# Altium PCB NiHAAx1to6.PcbDoc
Units mm, origin at the board's own origin, x right, y up, seen from the top; angles counter-clockwise.
Board outline 87.76 x 15.1 mm, 2 copper layers (Top Layer, Bottom Layer); 56 components, 30 nets, 145 pads, 163 vias.
Unrouted connection lines stored in the file: 1.
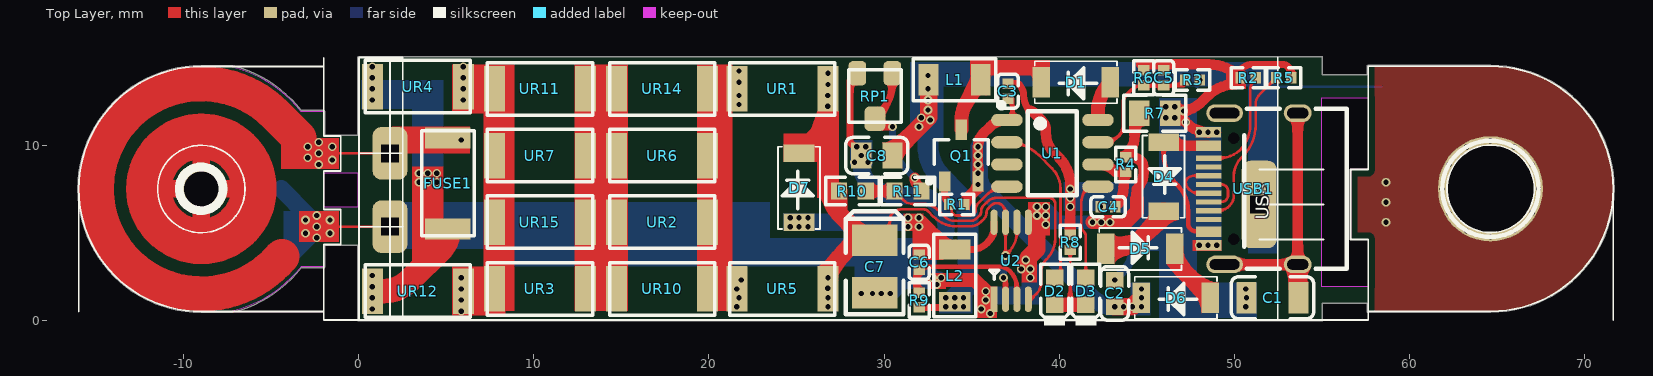
[diagram p0: Top Layer view]
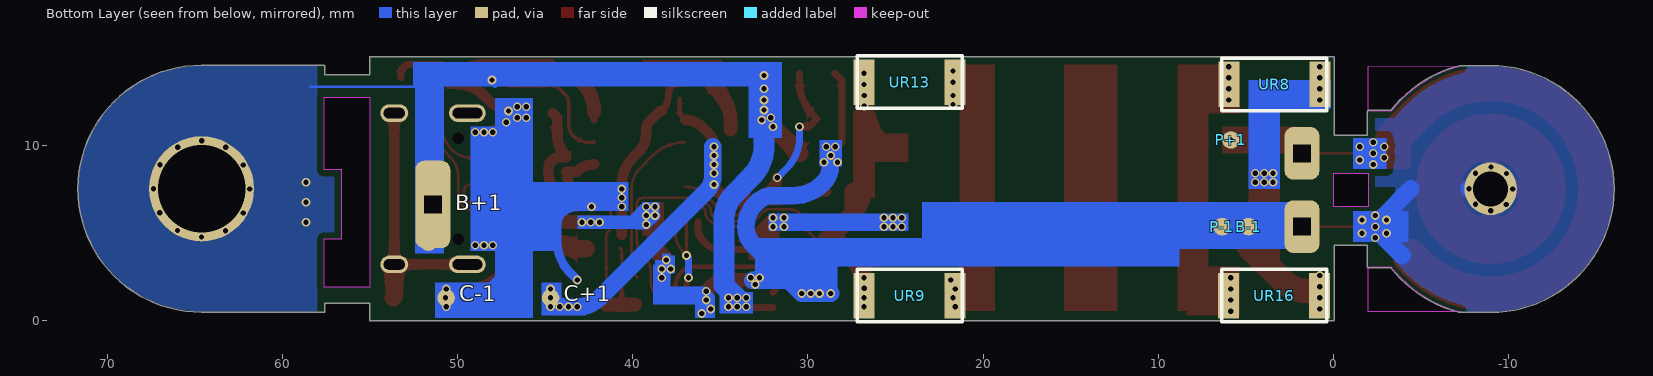
[diagram p1: Bottom Layer view, seen from below]
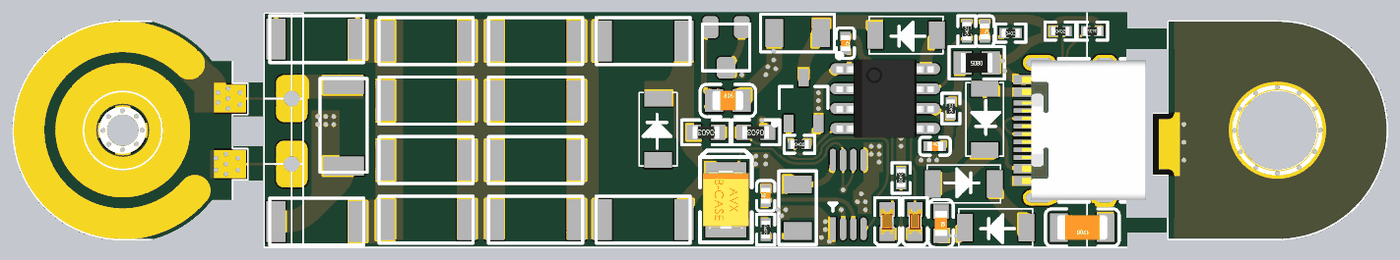
[diagram p2: 3D render of the assembled board from above, using the file's embedded part models]

## Layer stack, top to bottom
Top Solder: solder mask 0.0102, Solder Resist, Dk 3.5
Top Layer: signal copper 0.0356
Dielectric 1: dielectric 0.32, FR-4, Dk 4.8
Bottom Layer: signal copper 0.0356
Bottom Solder: solder mask 0.0102, Solder Resist, Dk 3.5

## Board outline
-9,0.436 -7.226,0.436 ccw(c-7.226,0.486) -7.195,0.447 ccw(c-8.986,7.472) -3.281,2.998 -2,2.998 ccw(c-2,3.048) -1.95,3.048 -1.95,4.27 -0.05,4.27 -0.05,0 ccw(c0,0) 0,-0.05 55,-0.05 ccw(c55,0) 55.05,0 55.05,0.966 57.608,0.966 57.608,0.5 ccw(c57.658,0.5) 57.658,0.45 64.658,0.45 ccw(c64.658,0.5) 64.659,0.45 ccw(c64.658,7.5) 71.708,7.5 ccw(c64.658,7.5) 64.658,14.55 ccw(c64.658,14.5) 64.657,14.55 57.658,14.55 ccw(c57.658,14.5) 57.608,14.5 57.608,14.02 55.05,14.02 55.05,15 ccw(c55,15) 55,15.05 0,15.05 ccw(c0,15) -0.05,15 -0.05,10.561 -1.963,10.561 -1.963,11.924 ccw(c-2.014,11.924) -2.014,11.975 -3.295,11.975 ccw(c-9,7.5) -7.216,14.527 ccw(c-7.245,14.486) -7.245,14.536 -9,14.536 ccw(c-9,7.486)
cut-out: -2,6.48 -0.03,6.48 -0.03,8.4 -2,8.4
cut-out: 55,1.905 55,12.7 57.658,12.7 57.658,8.604 56.658,8.604 56.658,4.604 57.658,4.604 57.658,1.905
cut-out: -7.239,0.486 -2,0.486 -2,3.048 -3.306,3.048 cw(c-8.986,7.472)
cut-out: -7.24,14.482 cw(c-9,7.5) -3.32,11.924 -2.014,11.924 -2.014,14.486

## Design rules (kind name [scope] priority, off if disabled: settings)
Clearance TL_B+_CLE [InNamedPolygon('TL_B+')] p1: gap=0.4 ignorepadtopadclearanceinfootprint=FALSE except(0: Arc-Text Arc-Hole Track-Text Track-Hole SMDPad-Text SMDPad-Hole THPad-Text THPad-Hole Via-Text Via-Hole Fill-Text Fill-Hole Poly-Text Poly-Hole Region-Text Region-Hole Text-Text Text-Hole)
Clearance BL-B-_CLE [InNamedPolygon('BL-B-')] p2: gap=0.4 ignorepadtopadclearanceinfootprint=FALSE except(0: Arc-Text Arc-Hole Track-Text Track-Hole SMDPad-Text SMDPad-Hole THPad-Text THPad-Hole Via-Text Via-Hole Fill-Text Fill-Hole Poly-Text Poly-Hole Region-Text Region-Hole Text-Text Text-Hole)
Clearance BL_B+_CLE [InNamedPolygon('BL_B+')] p3: gap=0.4 ignorepadtopadclearanceinfootprint=FALSE except(0: Arc-Text Arc-Hole Track-Text Track-Hole SMDPad-Text SMDPad-Hole THPad-Text THPad-Hole Via-Text Via-Hole Fill-Text Fill-Hole Poly-Text Poly-Hole Region-Text Region-Hole Text-Text Text-Hole)
Clearance [All] p4: gap=0.152 ignorepadtopadclearanceinfootprint=FALSE except(0: Arc-Hole Track-Hole SMDPad-Hole THPad-Hole Via-Hole Fill-Hole Poly-Hole Region-Hole Text-Hole)
PolygonConnect TL_B+_STY [All vs IsNamedPolygon('TL_B+')] p1: thpad.connectstyle=Direct thpad.reliefconductorwidth=0.254 thpad.reliefentries=4 thpad.polygonreliefangle="90 Angle" thpad.airgapwidth=0.254 smdpad.connectstyle=Direct smdpad.reliefconductorwidth=0.254 smdpad.reliefentries=4 smdpad.polygonreliefangle="90 Angle" smdpad.airgapwidth=0.254 via.connectstyle=Relief via.reliefconductorwidth=1 via.reliefentries=4 via.polygonreliefangle="90 Angle" via.airgapwidth=0.254
PolygonConnect BL-B-_STY [All vs IsNamedPolygon('BL-B-')] p2: connectstyle=Direct reliefconductorwidth=0.254 reliefentries=4 polygonreliefangle="90 Angle" airgapwidth=0.254
PolygonConnect BL_B+_STY [All vs IsNamedPolygon('BL_B+')] p3: thpad.connectstyle=Direct thpad.reliefconductorwidth=0.254 thpad.reliefentries=4 thpad.polygonreliefangle="90 Angle" thpad.airgapwidth=0.254 smdpad.connectstyle=Direct smdpad.reliefconductorwidth=0.254 smdpad.reliefentries=4 smdpad.polygonreliefangle="90 Angle" smdpad.airgapwidth=0.254 via.connectstyle=Relief via.reliefconductorwidth=1 via.reliefentries=4 via.polygonreliefangle="90 Angle" via.airgapwidth=0.254
PolygonConnect [All] p4: connectstyle=Relief reliefconductorwidth=0.254 reliefentries=4 polygonreliefangle="90 Angle" airgapwidth=0.254
RoomDefinition NiHAAx1to6 [InComponentClass('NiHAAx1to6')] p1: confinementstyle=ConfineOut formatcopy=TRUE lockcomponents=FALSE outline 4.318,18.161 25.781,18.161 25.781,20.828 4.318,20.828
RoutingVias [All] p1: holewidth=0.3 width=0.5 viastyle="Through Hole" minholewidth=0.3 minwidth=0.5 maxholewidth=5 maxwidth=5
SolderMaskExpansion [All] p1: expansion=0.102
Width [All] p1: maxlimit=5 minlimit=0.152 preferedwidth=0.254 minimp=50.000000 maximp=50.000000 favimp=50.000000
30 further rules are at their usual default settings.

## Components (designator, comment, footprint, x,y, rotation, side; value= is the part's Value field where it differs from the comment)
B+1 "B+" TAP 51.689,4.445 r90 bottom
B-1 "B-" TAP 4.826,5.334 r90 bottom
C1 "1nF (102) 10% 500V" 1206_C 52.197,1.27 r180 top
C2 "10uF (106) 10% 10V" 0603_C 43.18,1.524 r270 top
C3 "100nF (104) 10% 16V" 0402_C 37.084,13.081 r270 top
C4 "100nF (104) 10% 16V" 0402_C 42.799,6.477 r0 top
C5 "100nF (104) 10% 16V" 0402_C 45.974,13.843 r270 top
C6 "4.7pF (4R7) 0.25pF 50V" 0402_C 32.004,3.302 r90 top
C7 "100uF (107) ±10% 6.3V" CASE-B_3528 29.464,3.048 r90 top
C8 "22uF (226) 20% 25V" 0805_C 29.591,9.398 r0 top
C+1 "C+" TAP 44.704,1.27 r90 bottom
C-1 "C-" TAP 50.673,1.27 r90 bottom
D1 "M7" CMS01 43.307,14.789 r180 top
D2 "绿灯 0603" 0603_LED_S1 39.751,1.651 r90 top
D3 "红灯 0603" 0603_LED_S1 41.529,1.651 r90 top
D4 "M7" CMS01 44.774,10.541 r270 top
D5 "M7" CMS01 42.291,2.864 r0 top
D6 "M7" CMS01 49.022,2.47 r180 top
D7 "M7" CMS01 26.346,5.207 r90 top
FUSE1 "OMF125" 2512 3.58,10.807 r270 top
L1 "10uH ±10%" 1206_L 34.036,13.716 r180 top
L2 "4.7uH  ±10%" 1206_L 34.036,2.54 r90 top
P+1 "P+" TAP 5.842,10.287 r90 bottom
P-1 "P-" TAP 6.35,5.334 r90 bottom
Q1 "AO3401A P道沟 X13A15 SOT-23" SOT-23-3L 34.417,9.398 r270 top
R1 "100KΩ (1003) ±1%" 0402_R 34.163,6.604 r0 top
R2 "5.1KΩ (5101) ±1%" 0402_R 50.8,13.843 r0 top
R3 "1MΩ (1004) ±1%" 0402_R 47.625,13.716 r0 top
R4 "10KΩ (1002) ±1%" 0402_R 43.815,8.89 r90 top
R5 "5.1KΩ (5101) ±1%" 0402_R 52.832,13.843 r180 top
R6 "1MΩ (1004) ±1%" 0402_R 44.831,13.843 r90 top
R7 "10KΩ (1002) ±1%" 0805_R 45.466,11.811 r180 top
R8 "1KΩ (1001) ±1%" 0402_R 40.64,4.445 r270 top
R9 "150KΩ (1503) ±1%" 0402_R 32.004,1.143 r270 top
R10 "620KΩ (6203) ±1%" 0603_R 28.194,7.366 r180 top
R11 "130KΩ (1303) ±1%" 0603_R 31.369,7.366 r180 top
RP1 "ST-32ETA104" ST-32ETA104 27.98,14.297 r270 top
U1 "HXT8676" SOP-8_150mil 39.624,9.525 r270 top
U2 "LM2623MM" VSSOP8_3×3mm 36.292,1.188 r90 top
UR1 "R" 2512 27.19,14.708 r180 top
UR2 "R" 2512 20.325,7.088 r180 top
UR3 "R" 2512 13.347,3.278 r180 top
UR4 "R" 2512 6.369,14.835 r180 top locked
UR5 "R" 2512 27.19,3.278 r180 top locked
UR6 "R" 2512 20.325,10.898 r180 top
UR7 "R" 2512 13.347,10.898 r180 top
UR8 "R" 2512 6.362,11.962 r180 bottom locked
UR9 "R" 2512 27.197,-0.103 r180 bottom locked
UR10 "R" 2512 20.325,3.278 r180 top
UR11 "R" 2512 13.347,14.708 r180 top
UR12 "R" 2512 6.369,3.151 r180 top locked
UR13 "R" 2512 27.19,12.089 r180 bottom
UR14 "R" 2512 20.325,14.708 r180 top
UR15 "R" 2512 13.347,7.088 r180 top
UR16 "R" 2512 6.369,-0.103 r180 bottom locked
USB1 "USB_TYPE_C_16P" "USB Type-C-16Pin_A" 53.636,7.5 r90 top locked

## Footprints (in the part's own frame and the unit in brackets; to place one, negate y for a bottom-side part, rotate by r counter-clockwise, add the part's x,y. Pads: shape width x height; smd on the part's side, far side on the other; paste and mask are expansions set on the pad)
0402_C [mm]
  rect 0.6x0.65 smd mask+0.051: 1(-0.425,0) 2(0.425,0)
  silkscreen extent -0.97,-0.58 0.98,0.58, body extent -0.48,-0.3 0.52,0.3, height 0.2
0402_R [mm]
  rect 0.6x0.65 smd mask+0.051: 1(-0.425,0) 2(0.425,0)
  silkscreen extent -0.97,-0.58 0.98,0.58, body extent -0.57,-0.27 0.58,0.28, height 0.41
0603_C [mm]
  rect 0.93x0.98 smd: 1(-0.77,0) 2(0.77,0)
  silkscreen extent -1.53,-0.79 1.54,0.79, body extent -0.8,-0.4 0.8,0.4, height 0.3
0603_LED_S1 [mm]
  rect 0.93x0.98 smd: A(0.77,0) K(-0.77,0)
  silkscreen extent -1.98,-0.79 1.54,0.79, body extent -0.8,-0.4 0.8,0.4, height 0.6
0603_R [mm]
  rect 0.93x0.98 smd: 1(-0.77,0) 2(0.77,0)
  silkscreen extent -1.53,-0.79 1.54,0.79, body extent -0.85,-0.4 0.85,0.4, height 0.56
0805_C [mm]
  rect 1.16x1.47 smd: 1(-0.89,0) 2(0.89,0)
  silkscreen extent -1.77,-1.04 1.77,1.04, body extent -1,-0.62 1,0.63, height 0.77
0805_R [mm]
  rect 1.16x1.47 smd: 1(-0.89,0) 2(0.89,0)
  silkscreen extent -1.77,-1.04 1.77,1.03, body extent -1,-0.62 1,0.63, height 0.49
1206_C [mm]
  rect 1.13x1.8 smd: 1(-1.49,0) 2(1.49,0)
  silkscreen extent -2.36,-1.2 2.35,1.2, body extent -1.6,-0.81 1.6,0.79, height 1
1206_L [mm]
  rect 1.13x1.8 smd: 1(-1.49,0) 2(1.49,0)
  silkscreen extent -2.36,-1.2 2.35,1.2
2512 [mm] "SL1TTE2R00F KOA原装贴片传感电阻 2512 2RF 2.0欧 2R 1% 1W"
  rect 1.2x2.6 smd: 1(0.4,1.5) 2(5.6,1.5)
  silkscreen extent 0,0 6,3
CASE-B_3528 [mm]
  rect 1.8x2.6 smd: 1(1.5,0) 2(-1.5,0)
  silkscreen extent -2.73,-1.65 3.16,1.65, body extent -1.85,-1.47 1.85,1.46, height 2.03
CMS01 [mm]
  rect 1x1.75 smd: 1(0.381,1.2) 2(4.318,1.2)
  silkscreen extent 0,0 4.7,2.4
SOP-8_150mil [mm]
  oval 0.7x1.8 smd: 1(-1.905,-2.6) 2(-0.635,-2.6) 3(0.635,-2.6) 4(1.905,-2.6) 5(1.905,2.6) 6(0.635,2.6) 7(-0.635,2.6) 8(-1.905,2.6)
  silkscreen extent -2.9,-3.07 2.4,1.4, body extent -2.5,-3.1 2.5,3.1, height 1.75
SOT-23-3L [mm] "http://www.aosmd.com/res/packaging_information/SOT-23-3L.pdf"
  rect 1.15x0.65 smd: 1(1.475,-0.95) 2(1.475,0.95) 3(-1.475,0)
  silkscreen extent -0.9,-1.95 1.6,1.55, body extent -0.9,-1.55 0.9,1.55, height 1.25
ST-32ETA104 [mm] "ST-32ETA104 COPAL ST-32TA100K 3X3 SMD可调电阻 贴片电位器"
  rrect50% 1.4x1 smd: 1(0.2,0.5) 3(0.2,2.5)
  rrect50% 1.4x1.2 smd: 2(2.8,1.5)
  silkscreen extent 0,0 3,3
TAP [mm]
  round 1 smd: 1(0,0)
"USB Type-C-16Pin_A" [mm]
  round 0 hole 0.65: 0(-2.89,3.65) 0(2.89,3.65)
  oval 1x1.6 hole 0.6 slot 1.2 at 90 deg: 1(-4.32,0) 1(4.32,0)
  oval 1x2.1 hole 0.6 slot 1.7 at 90 deg: 1(-4.32,4.18) 1(4.32,4.18)
  rect 0.3x1.45 smd: A1(-3.375,5.092) A4(-2.6,5.092) A5(-1.25,5.092) A6(-0.25,5.092) A7(0.25,5.092) A8(-1.75,5.092) A9(2.6,5.1) A12(3.375,5.1) B1(3.075,5.1) B4(2.3,5.1) B5(1.75,5.092) B6(0.75,5.092) B7(-0.75,5.092) B8(1.25,5.092) B9(-2.3,5.092) B12(-3.075,5.092)
  silkscreen extent -4.57,-2.79 4.57,3.05, body extent -4.47,-2.6 4.47,5.3, height 3.25
VSSOP8_3×3mm [mm]
  rect 1.45x0.4 smd: 1(0,0)
  oval 1.45x0.4 smd: 2(0,-0.65) 3(0,-1.3) 4(0,-1.95) 5(4.4,-1.95) 6(4.4,-1.3) 7(4.4,-0.65) 8(4.4,0)
  silkscreen extent 1.14,-0.25 1.65,0.25

## Part data
C1: library part "1206 1nF (102) 10% 500V", "贴片电容", Package=1206, SuppliersPartNumber=C35216, ComponentLink1Description=供应商链接, ComponentLink1URL=http://www.szlcsc.com/product/details_36187.html, Supplier=LC
C2: library part "0603 10uF (106) 10% 10V", "贴片电容", Package=0603, SuppliersPartNumber=C19702, ComponentLink1Description=供应商链接, ComponentLink1URL=http://www.szlcsc.com/product/details_20411.html, Supplier=LC
C3 C4 C5: library part "0402 100nF (104) 10% 16V", "贴片电容", Package=0402, SuppliersPartNumber=C1525, ComponentLink1Description=供应商链接, ComponentLink1URL=http://www.szlcsc.com/product/details_1877.html, Supplier=LC
C6: library part "0402 4.7pF (4R7) 0.25pF 50V", "贴片电容", Package=0402, SuppliersPartNumber=C1569, ComponentLink1Description=供应商链接, ComponentLink1URL=http://www.szlcsc.com/product/details_1921.html, Supplier=LC
C7: library part "3528 100uF (107) 10% 6.3V", "钽电容", Package=3528, SuppliersPartNumber=C16133, ComponentLink1Description=供应商链接, ComponentLink1URL=http://www.szlcsc.com/product/details_16815.html, Supplier=LC
C8: library part "0805 22uF (226) 20% 25V", "贴片电容", Package=0805, SuppliersPartNumber=C45783, ComponentLink1Description=供应商链接, ComponentLink1URL=http://www.szlcsc.com/product/details_46786.html, Supplier=LC
D1 D4 D5 D6 D7: library part "SMA(DO-214AC) M7", "二极管", Package=SMA(DO-214AC), SuppliersPartNumber=C95872, ComponentLink1Description=供应商链接, ComponentLink1URL=http://www.szlcsc.com/product/details_2841.html, Supplier=LC, 备注="1N4007 4007 编号C2464 已经停售, 使用新物料编号C95872"
D2: library part "0603 绿灯", "发光二极管", Package=0603, SuppliersPartNumber=C72043, ComponentLink1Description=供应商链接, ComponentLink1URL=http://www.szlcsc.com/product/details_73152.html, Supplier=LC
D3: library part "0603 红灯", "发光二极管", Package=0603, SuppliersPartNumber=C2286, ComponentLink1Description=供应商链接, ComponentLink1URL=http://www.szlcsc.com/product/details_2659.html, Supplier=LC
FUSE1: library part FUSE, "3404.0006.22 OMF125 250mA OMF125 SCHURTER 贴装快速熔断保险丝"
L1: library part "1206 10uH 10%", "贴片电感", Package=1206, SuppliersPartNumber=C1051, ComponentLink1Description=供应商链接, ComponentLink1URL=http://www.szlcsc.com/product/details_1403.html, Supplier=LC
L2: library part "1206 4.7uH  10%", "贴片电感", Package=1206, SuppliersPartNumber=C1049, ComponentLink1Description=供应商链接, ComponentLink1URL=http://www.szlcsc.com/product/details_1401.html, Supplier=LC
Q1: "MOS(场效应管)", Package=SOT-23, SuppliersPartNumber=C15127, ComponentLink1Description=供应商链接, ComponentLink1URL=http://www.szlcsc.com/product/details_15801.html, Supplier=LC
R1: library part "0402 100KΩ (1003) 1%", "贴片电阻", Package=0402, SuppliersPartNumber=C25741, ComponentLink1Description=供应商链接, ComponentLink1URL=http://www.szlcsc.com/product/details_26484.html, Supplier=LC
R2 R5: library part "0402 5.1KΩ (5101) 1%", "贴片电阻", Package=0402, SuppliersPartNumber=C25905, ComponentLink1Description=供应商链接, ComponentLink1URL=http://www.szlcsc.com/product/details_26648.html, Supplier=LC
R3 R6: library part "0402 1MΩ (1004) 1%", "贴片电阻", Package=0402, SuppliersPartNumber=C26083, ComponentLink1Description=供应商链接, ComponentLink1URL=http://www.szlcsc.com/product/details_26826.html, Supplier=LC
R4 R7: library part "0402 10KΩ (1002) 1%", "贴片电阻", Package=0402, SuppliersPartNumber=C25744, ComponentLink1Description=供应商链接, ComponentLink1URL=http://www.szlcsc.com/product/details_26487.html, Supplier=LC
R8: library part "0402 1KΩ (1001) 1%", "贴片电阻", Package=0402, SuppliersPartNumber=C11702, ComponentLink1Description=供应商链接, ComponentLink1URL=http://www.szlcsc.com/product/details_12256.html, Supplier=LC
R9: library part "0402 150KΩ (1503) 1%", "贴片电阻", Package=0402, SuppliersPartNumber=C25755, ComponentLink1Description=供应商链接, ComponentLink1URL=http://www.szlcsc.com/product/details_26498.html, Supplier=LC
R10: library part "0603 620KΩ (6203) 1%", "贴片电阻", Package=0603, SuppliersPartNumber=C23219, ComponentLink1Description=供应商链接, ComponentLink1URL=http://www.szlcsc.com/product/details_23946.html, Supplier=LC
R11: library part "0603 130KΩ (1303) 1%", "贴片电阻", Package=0603, SuppliersPartNumber=C22795, ComponentLink1Description=供应商链接, ComponentLink1URL=http://www.szlcsc.com/product/details_23522.html, Supplier=LC
RP1: library part RP, "3X3 SMD可调电阻 贴片电位器", =https://item.taobao.com/item.htm?spm=a1z0d.6639537.1997196601.4.49877484JIJ1qa&id=576163612873
U1: "镍氢电池充电 IC", =http://www.husintent.com/upLoad/product/month_1812/201812041747455787.pdf
U2: library part LM2623, "3 General-Purpose, Gated-Oscillator-Based DC-DC Boost Converter", =https://www.ti.com/lit/ds/symlink/lm2623.pdf
USB1: ComponentLink1Description=供应商链接

## Free pads (board coordinates)
  round 3 hole 2: 1(-9,7.5)
  round 6 hole 5: 1(64.643,7.5)
  rrect50% 2x3 hole 1 square: 2(1.778,5.334) 2(1.778,9.525)
  rrect50% 2x5 hole 1 square: 2(51.435,6.604)

## Via types
v1: diameter 0.5, hole 0.3, Top Layer to Bottom Layer, tented both sides, 163 vias

## Nets (pads, with @x,y where several pads share a name; then routed paths per layer and width w, separated by ;. In a path a pad name is that pad's centre, name@x,y a point inside that pad or via, vN(x,y) a via of type N, cw(c..) or ccw(c..) an arc to the next point about the centre after c; other vN are vias at no path point)
B+: B+1.1 C8.2 L1.2 L2.1 pad.1@64.643,7.5 pad.2@51.435,6.604 R3.2 R9.2 | length 43.2
  Top Layer w0.4: R9.2 L2.1@33.704,0.718
  Top Layer w1: C8.2@30.481,9.525 v1(32.005,11.049) 32.546,11.59 L1.2
  Bottom Layer w0.152: 52.197,13.335 58.42,13.335
  Bottom Layer w0.4: v1(32.512,12.573) 32.512,12.827 32.639,12.954 32.639,13.611 cw(c33.506,13.611) 32.893,14.224 cw(c33.506,13.611) 33.506,14.478 46.504,14.478 cw(c46.504,13.611) 47.116,14.225 47.879,13.462 48.05,13.633 v1(48.05,13.716)
  Bottom Layer w1.2: v1(32.512,12.573) v1(32.512,12.002) 32.512,9.963 ccw(c35.052,9.963) 33.256,8.167 34.181,7.242 34.181,7.228 ; 33.807,0.991 34.798,1.982 34.798,5.738 ccw(c32.69,5.738) 34.181,7.227
  other v1: 33.528,0.762 34.036,0.762 34.544,0.762 33.528,1.27 34.036,1.27 34.544,1.27 64.65,4.743 63.274,5.108 66.024,5.115 58.674,5.588 62.265,6.112 67.028,6.124 58.674,6.731 61.893,7.486 67.393,7.5 58.674,7.874 62.258,8.862 67.021,8.874 63.262,9.871 66.012,9.878 64.636,10.243 32.639,11.43 32.131,11.557 32.512,13.208 32.512,13.97
B-: B-1.1 C7.2 C8.1 P-1.1 pad.1@-9,7.5 pad.2@1.778,5.334 R4.2 R7.2 RP1.1 U2.1 U2.5 | length 79.3
  Top Layer w0.152: -1.27,5.334 pad.2@1.778,5.334
  Top Layer w0.4: RP1.1 28.067,13.684 28.067,10.159 28.702,9.524 v1(28.702,9.397)
  Top Layer w0.6: 44.44,6.906 44.44,7.483 ccw(c43.497,8.426) 44.831,8.426 44.831,8.596 ccw(c43.814,8.596) 44.733,9.031 ccw(c44.047,8.345) 44.047,9.315 R4.2 ccw(c42.589,10.541) 44.323,10.541 44.323,11.558 R7.2
  Top Layer w0.8: v1@32.893,2.286 35.179,2.286 v1(35.814,1.651) 36.068,1.397 36.068,0.635 ; 38.242,2.667 38.354,2.779 v1(38.354,2.921) 38.354,3.444 v1@38.242,3.556 ; v1(41.91,5.588) v1(42.418,5.588) v1(42.91,5.588) 43.815,5.588 44.44,6.213 44.44,6.906
  Top Layer w1: -12,7.5 pad.1@-9,7.5 ; -9,4.5 pad.1@-9,7.5 ; -9,10.5 pad.1@-9,7.5 ; v1(-7.767,7.5) -6,7.5 ; v1@38.242,3.556 38.735,4.049 38.735,5.207
  Top Layer w2.6: -12,7.5 ccw(c-9,7.5) -9,4.5 ccw(c-9,7.5) -6,7.5 ccw(c-9,7.5) -9,10.5 ccw(c-9,7.5) -12,7.5
  Bottom Layer w0.4: 35.56,1.27 35.56,1.397 v1(35.814,1.651) 37.047,1.651
  Bottom Layer w0.6: v1(38.735,5.969) v1(39.243,5.461) 39.751,5.461 39.878,5.588 39.878,5.842 v1@39.37,6.35
  Bottom Layer w1: pad.1@-9,7.5 v1(-7.767,7.5) ; -4.445,7.493 -2.921,5.969 ; -3.937,3.683 -2.921,4.699 ; v1(28.702,1.524) v1(29.337,1.524) v1(29.845,1.524) v1(30.353,1.524) 32.004,3.175 ; 28.702,9.779 v1(28.702,9.397) 28.702,8.884 ccw(c30.22,8.884) 29.146,7.811 ; 29.147,7.811 ccw(c30.833,9.497) 30.833,7.112 31.99,7.112 cw(c31.99,5.785) 32.928,6.724 ; 32.928,6.723 32.928,6.709 33.01,6.628 cw(c31.715,5.334) 33.546,5.334 cw(c32.055,5.334) 33.109,4.28 32.004,3.175 ; v1@33.147,2.286 32.893,2.286 v1(32.766,2.413) 32.004,3.175
  other v1: 36.068,0.381 35.56,0.635 35.814,1.143 33.02,2.032 33.274,2.413 38.354,2.413 37.846,2.921 38.1,3.429 -2.413,4.699 -3.048,4.953 -1.651,4.953 -2.413,5.334 -3.048,5.715 -1.651,5.715 -2.413,5.969 39.243,5.969 -9.01,6.243 38.735,6.477 39.243,6.477 -9.896,6.604 -8.128,6.614 -10.267,7.486 -9.906,8.372 -8.138,8.382 -9.024,8.743 28.321,9.017 29.083,9.017 28.448,9.906 28.956,9.906
GND: C1.2 C2.1 C3.1 C4.1 C5.1 C-1.1 R2.1 R5.1 R6.2 R7.1 R8.1 USB1.A1 USB1.A12 USB1.B1 USB1.B12 | length 44.5
  Top Layer w0.4: C3.1 37.613,13.506 cw(c37.613,13.356) 37.719,13.462 cw(c37.106,12.849) 37.973,12.849 ccw(c39.252,12.849) 38.348,11.944 ; R8.1 v1(40.64,6.477) ; R2.1 50.375,14.245 cw(c50.525,14.245) 50.419,14.351 cw(c51.032,13.738) 51.032,14.605 52.779,14.605 cw(c52.779,14.171) 53.086,14.478 cw(c52.673,14.065) 53.257,14.065 R5.1
  Top Layer w0.6: 38.348,11.944 cw(c38.348,11.638) 38.564,11.855 38.989,11.43 cw(c38.376,10.817) 39.243,10.817 39.243,10.668 ccw(c40.776,10.668) 39.692,9.584 40.005,9.271 cw(c38.472,7.738) 40.64,7.738 R8.1 ; 44.704,14.605 48.561,14.605 cw(c48.561,12.065) R2.1@50.357,13.861 ; R7.1 R7.1@46.446,11.811 ; USB1.B1@48.536,10.702 cw(c48.536,12.372) 47.356,11.191 v1(47.244,11.303) 46.736,11.811 R7.1@46.446,11.811 ; 50.038,13.462 ccw(c50.038,11.316) 48.52,12.833 48.242,12.555 cw(c46.446,14.351) R7.1@46.446,11.811
  Bottom Layer w0.5: v1(42.374,6.477) 43.149,6.477 cw(c43.149,5.176) 44.069,6.096 cw(c43.456,5.483) 44.323,5.483 44.323,4.489 cw(c41.783,4.489) 44.304,4.178 ; v1(43.18,2.294) 43.579,2.693 ccw(c41.783,4.489) 44.304,4.178 ; v1(49.01,4.27) v1(48.514,4.27) v1(48.006,4.27) 46.99,4.27 ; v1(50.707,1.27) 49.82,1.27 cw(c49.82,3.81) 48.024,2.014 47.734,2.304 cw(c49.53,4.1) 47.256,2.969 cw(c49.53,4.1) 46.99,4.1 46.99,4.27 ; 44.304,4.178 cw(c44.527,3.955) 44.527,4.27 46.99,4.27
  other v1: 50.673,0.762 50.673,1.778 40.64,6.985 40.64,7.493 48.006,10.73 48.514,10.73 49.01,10.73 46.101,11.557 46.609,11.557 47.117,11.938 46.101,12.192 46.609,12.192
NetC1_1: C1.1 USB1.1 | length 14.8
  Top Layer w0.6: USB1.1@49.456,3.18 53.636,3.18 USB1.1@53.636,11.82
  Top Layer w1: USB1.1@53.636,3.18 53.636,1.321 C1.1
NetC4_2: C4.2 R4.1 U1.6 | length 3.9
  Top Layer w0.6: U1.6 cw(c42.224,7.502) 43.205,8.484 43.224,8.465 R4.1 43.688,8.338 43.688,7.597 cw(c42.104,7.597) C4.2
NetC5_2: C5.2 R3.1 R6.1 U1.7 | length 7.2
  Top Layer w0.2: U1.7 42.514,10.16 ccw(c42.514,11.461) 42.683,10.171 ccw(c42.514,11.461) 43.434,10.541 ccw(c42.902,11.073) 43.654,11.073 43.654,12.439 cw(c44.203,12.439) 43.666,12.551 cw(c44.203,12.439) 43.815,12.827 44.105,13.117 cw(c44.831,12.392) 44.466,13.351 cw(c44.831,12.392) R6.1
  Top Layer w0.254: R6.1 R3.1@47.117,13.418
NetC6_1: C6.1 R9.1 U2.3 | length 8.5
  Top Layer w0.254: C6.1 32.175,3.048 36.559,3.048 cw(c36.559,2.12) 37.168,2.82 ; 37.17,2.822 37.215,2.776 ; 37.215,2.776 cw(c36.246,1.842) 37.563,2.122 cw(c36.246,1.842) 37.592,1.842 U2.3
  Top Layer w0.4: R9.1 31.877,1.695 31.877,2.75 C6.1
NetC6_2: C6.2 D7.1 L2.2 U2.8 | length 6.9
  Top Layer w0.4: 32.512,4.826 33.308,4.03 L2.2 34.984,4.03 ccw(c34.984,5.338) 35.909,4.413 ccw(c34.984,5.338) 36.292,5.338 U2.8
  Top Layer w0.6: v1@32.004,5.715 32.131,5.715 L2.2@33.337,4.508
  other v1: 24.638,5.334 25.146,5.334 25.654,5.334 31.369,5.334 32.004,5.334 24.638,5.842 25.146,5.842 25.654,5.842 31.369,5.842 32.004,5.842
NetC7_1: C7.1 D7.2 R10.2 U2.2 U2.6 U2.7 UR1.1 UR5.1 UR9.1 UR13.1 | length 33.7
  Top Layer w0.152: C7.1 30.104,5.188 ccw(c29.502,5.789) 30.353,5.789 cw(c30.787,5.789) 30.48,6.096 cw(c31.031,5.545) 31.031,6.324 32.267,6.324 cw(c32.267,5.978) 32.512,6.223 32.835,5.9 ccw(c34.18,7.246) 33.924,5.36 34.959,5.36 ccw(c34.959,6.137) 35.506,5.586 ccw(c34.959,6.137) 35.508,5.588 35.73,5.81 ccw(c35.434,6.106) 35.852,6.106 cw(c36.271,6.106) 35.975,6.402 36.116,6.543 cw(c36.449,6.209) 36.449,6.681 cw(c36.449,6.252) 36.752,6.555 cw(c36.293,6.096) 36.942,6.096 U2.7 v1(36.942,3.683) v1@37.064,3.805 ; v1@37.064,3.805 ccw(c35.789,5.08) 37.592,5.08 U2.6
  Top Layer w0.3: v1(36.83,2.413) cw(c36.561,2.143) 36.942,2.143 U2.2
  Top Layer w1: UR5.1 v1(26.79,1.82) 26.79,1.862 cw(c29.33,1.862) 27.534,3.658 28.424,4.548 28.98,4.548 27.534,5.994 cw(c29.33,7.79) 27.424,6.111 ; UR1.1 v1(26.79,12.827) v1(26.79,12.221) cw(c24.25,12.221) 26.046,10.425 D7.2 26.79,9.525 26.79,7.79 ccw(c29.33,7.79) 27.424,6.111 ; R10.2 27.424,6.111
  Bottom Layer w0.4: v1(36.83,2.413) 36.83,3.571 v1(36.942,3.683)
  other v1: 26.797,0.762 26.797,1.27 26.797,2.413 26.797,13.462 26.797,14.097
NetD1_1: D1.1 U1.8 | length 2.3
  Top Layer w0.4: U1.8 42.224,11.894
  Top Layer w0.8: 42.224,11.894 cw(c44.621,11.894) D1.1
NetD1_2: D1.2 L1.1 Q1.3 | length 7.2
  Top Layer w0.4: L1.1@35.526,13.462 L1.1 35.852,14.042 cw(c37.211,12.683) 37.211,14.605 cw(c37.211,12.459) D1.2@38.728,13.977 ; D1.2@38.729,13.976 D1.2@38.989,13.716
  Top Layer w0.8: Q1.3 34.417,11.301 cw(c36.957,11.301) 35.161,13.097 L1.1@35.526,13.462
NetD2_A: D2.A U1.2 | length 9.9
  Top Layer w0.152: U1.2 U1.2@37.048,10.16 ; U1.2@37.302,10.16 U1.2@37.048,10.16 ; D2.A 40.087,2.757 40.087,7.493 ccw(c38.444,7.493) 39.605,8.655 38.844,9.416 ccw(c37.048,7.62) U1.2@37.048,10.16
NetD2_K: D2.K D3.K R8.2 | length 5
  Top Layer w0.162: 40.64,0.881 R8.2 R8.2@40.767,4.147
  Top Layer w0.8: D2.K@39.878,0.881 40.64,0.881 D3.K
NetD3_A: D3.A U1.5 | length 5.4
  Top Layer w0.152: D3.A 41.529,4.773 ccw(c41.095,4.773) 41.402,5.08 cw(c41.709,5.387) 41.275,5.387 41.275,6.7 cw(c42.576,6.7) 41.529,7.472 cw(c42.576,6.7) U1.5@41.656,7.62
NetD4_2: D4.2 D5.1 | length 4.2
  Top Layer w1: D5.1 43.017,4.064 ccw(c43.017,6.604) 44.813,4.808 45.974,5.969 D4.2
NetD5_2: D5.2 D6.1 | length 5
  Top Layer w1: D6.1 47.148,2.763 ; 47.148,2.763 cw(c48.449,4.064) D5.2 ccw(c48.449,4.064) 47.148,2.763
NetFUSE1_1: FUSE1.1 P+1.1 pad.2@1.778,9.525 | length 34
  Top Layer w0.152: -1.27,9.525 pad.2@1.778,9.525
  Top Layer w2: -4.404,3.643 cw(c-9,7.5) -4.757,11.743 -4.757,11.732 -3.797,10.772 -3.787,10.772 -3.429,10.414 -3.429,10.16
  other v1: -2.286,8.89 -1.524,9.144 -2.921,9.271 -2.286,9.525 -2.921,9.906 -1.524,9.906 -2.286,10.16 5.842,10.287
NetFUSE1_2: FUSE1.2 UR4.2 UR8.2 UR12.2 UR16.2 | length 5.2
  Top Layer w1.4: 1.397,1.651 ccw(c1.397,3.797) 2.915,2.28 4.721,4.086 ccw(c3.854,4.953) FUSE1.2@5.08,4.953
  other v1: 0.762,0.635 0.762,1.27 0.762,1.905 0.762,2.54 3.429,7.874 3.937,7.874 4.445,7.874 3.429,8.382 3.937,8.382 4.445,8.382 0.762,12.573 0.762,13.208 0.762,13.843 0.762,14.478
NetQ1_1: Q1.1 R1.1 U1.4 | length 5.5
  Top Layer w0.152: R1.1@33.865,6.604 33.865,6.261 ccw(c34.157,6.261) 33.951,6.054 ccw(c34.157,6.261) 34.157,5.969 34.848,5.969 ccw(c34.848,6.403) 35.155,6.096 35.185,6.126 ccw(c35.043,6.267) 35.243,6.267 35.243,6.35 cw(c35.681,6.35) 35.371,6.659 ; 35.372,6.659 35.843,7.131 cw(c37.024,5.95) U1.4
  Top Layer w0.4: Q1.1@33.467,7.565 33.467,7.258 ccw(c34.392,7.258) R1.1
NetR2_2: R2.2 USB1.B5 | length 6.3
  Top Layer w0.152: USB1.B5@49.141,9.25 ccw(c49.141,11.035) 50.333,9.706 ; 50.334,9.706 ccw(c48.9,11.139) 50.927,11.139 50.927,13.124 cw(c51.944,13.124) R2.2
  Top Layer w0.254: USB1.B5 USB1.B5@49.141,9.25
NetR5_2: R5.2 USB1.A5 | length 9.5
  Top Layer w0.152: USB1.A5 49.103,6.25 ccw(c49.103,7.131) 49.984,7.131 49.984,8.255 cw(c51.388,8.255) 50.396,9.247 50.487,9.339 ccw(c48.691,11.136) 51.231,11.136 51.231,12.319 cw(c52.073,12.319) 51.477,12.913 ; 51.478,12.914 R5.2
NetR10_1: R10.1 R11.2 U2.4 | length 18.9
  Top Layer w0.152: R11.2 31.115,6.85 ; 31.116,6.849 ccw(c31.649,7.384) 31.649,6.629 32.385,6.629 cw(c32.385,5.769) 32.993,6.377 ; 32.429,6.608 cw(c32.118,5.168) 33.16,6.21 33.472,5.898 ccw(c34.036,6.463) 34.036,5.665 34.925,5.665 ccw(c34.925,6.218) 35.316,5.827 35.458,5.969 ccw(c35.243,6.185) 35.548,6.185 35.548,6.223 cw(c35.988,6.223) 35.676,6.534 35.901,6.758 cw(c36.449,6.209) 36.449,6.985 39.422,6.985 cw(c39.422,6.625) 39.677,6.88 cw(c39.422,6.625) 39.782,6.625 39.782,4.675 cw(c38.077,4.675) 39.283,3.469 39.243,3.429 ccw(c39.856,2.816) 38.999,2.947 ccw(c39.856,2.816) 38.989,2.816 38.989,2.195 cw(c37.982,2.195) 38.694,1.483 38.399,1.188 U2.4
  Top Layer w0.6: R10.1 R11.2
NetR11_1: R11.1 RP1.2 RP1.3 | length 8.2
  Top Layer w0.4: v1(30.48,11.049) 29.928,11.049 RP1.2 29.736,11.753 ccw(c27.94,13.549) 30.48,13.549 RP1.3
  Top Layer w0.6: v1(31.75,8.128) ccw(c32.363,8.128) 31.93,7.694 R11.1@32.139,7.485
  Bottom Layer w0.4: v1(30.48,11.049) 30.48,10.45 ccw(c33.02,10.45) 31.224,8.654 v1(31.75,8.128)
NetUR1_2: UR1.2 UR2.1 UR5.2 UR6.1 UR9.2 UR10.1 UR13.2 UR14.1
  other v1: 21.59,0.762 21.717,1.27 21.59,1.778 21.844,2.286 21.717,12.319 21.717,12.827 21.717,13.589 21.717,14.224
NetUR2_2: UR2.2 UR3.1 UR6.2 UR7.1 UR10.2 UR11.1 UR14.2 UR15.1
NetUR3_2: UR3.2 UR4.1 UR7.2 UR8.1 UR11.2 UR12.1 UR15.2 UR16.1
  other v1: 5.842,0.508 5.842,1.143 5.842,1.778 5.842,2.413 5.969,12.573 5.969,13.208 5.969,13.843 5.969,14.478
NetUSB1_A6: USB1.A6 USB1.B6 | length 3.1
  Top Layer w0.152: USB1.A6 47.92,7.25 cw(c47.92,7.915) 47.697,7.288 cw(c47.92,7.915) 47.45,7.445 47.4,7.494 cw(c47.777,7.871) 47.244,7.871 cw(c47.557,7.871) 47.335,8.092 cw(c47.715,7.713) 47.715,8.25 USB1.B6
NetUSB1_A7: USB1.A7 USB1.B7 | length 2.9
  Top Layer w0.152: USB1.B7 49.276,6.75 ccw(c49.276,7.131) 49.657,7.131 49.657,7.366 ccw(c49.273,7.366) 49.273,7.75 USB1.A7
VCHG: C2.2 C3.2 C+1.1 D6.2 Q1.2 R1.2 U1.1 | length 22.3
  Top Layer w0.254: U1.1 37.338,11.744 C3.2@37.338,12.656
  Top Layer w0.4: Q1.2@35.367,7.554 v1(35.367,7.747) Q1.2
  Top Layer w0.6: R1.2 cw(c35.001,6.604) 34.709,6.896 Q1.2@35.367,7.554 ; Q1.2 v1(35.367,8.382) v1(35.367,8.89) v1(35.367,9.398) v1(35.367,9.906) cw(c36.434,9.906) 35.68,10.661 36.042,11.023 cw(c37.024,10.042) U1.1
  Top Layer w1: v1(43.18,0.754) v1(43.688,0.754) v1(44.188,0.754) v1(44.704,1.27)
  Bottom Layer w1: v1@35.433,9.906 35.433,8.255 ccw(c36.659,8.255) 35.792,7.388 ; 35.792,7.388 41.893,1.287 ; 41.893,1.287 ccw(c43.18,2.574) v1(43.18,0.754) v1(43.688,0.754)
  other v1: 44.704,0.762 44.704,1.778
VUSB: D4.1 USB1.A4 USB1.A9 USB1.B4 USB1.B9 | length 8.7
  Top Layer w0.254: D4.1@46.101,10.033 D4.1 45.974,9.497 ccw(c48.359,9.497) 46.673,7.811 46.742,7.741 ; 46.743,7.74 cw(c45.225,6.223) 47.371,6.223 47.371,5.514 ccw(c47.805,5.514) 47.498,5.207 ccw(c47.805,5.514) 47.805,5.08 48.364,5.08 USB1.A4
  Top Layer w0.6: D4.1@46.482,9.95 USB1.A9@48.43,9.95
pads on no net: U1.3 USB1.0 USB1.A8 USB1.B8

## Polygon pours and split planes (outlines as drawn)
B+ on Bottom Layer "BL_B+" (solid, pour order 0): 56.658,4.604 56.658,8.604 58.039,8.604 58.039,14.5 64.658,14.5 cw(c64.658,7.5) 64.658,0.5 58.039,0.5 58.039,4.604
B- on Bottom Layer "BL-B-" (solid, pour order 9): -9,0.486 cw(c-9,7.486) -9,14.486 -2.413,14.486 -2.413,10.511 -1.03,10.511 -1.03,8.511 -2,8.511 -2,6.32 -1.03,6.32 -1.03,4.32 -2.413,4.32 -2.413,0.486
B+ on Top Layer "TL_B+" (solid, pour order 2): 56.658,4.604 56.658,8.604 58.039,8.604 58.039,14.5 64.658,14.5 cw(c64.658,7.5) 64.658,0.5 58.039,0.5 58.039,4.604

## Other copper
Top Layer:
  rectangle net NetFUSE1_1: -4.445,8.636 -1.143,10.414
  rectangle net B-: -3.429,4.445 -1.143,6.223
  rectangle net NetFUSE1_1: -3.048,8.636 -1.143,10.414
  rectangle net GND: 47.625,3.937 49.276,4.572
  rectangle net GND: 49.53,13.208 50.673,14.224
  rectangle net NetFUSE1_2: 3.048,3.302 4.826,8.763
  rectangle net NetFUSE1_1: 1.905,9.525 6.35,11.049
  rectangle net NetUR3_2: 5.334,0.254 8.382,3.048
  rectangle net NetUR3_2: 7.112,0.508 8.89,14.605
  rectangle net NetUR3_2: 5.334,11.811 8.382,14.605
  rectangle net NetUR2_2: 12.319,0.508 15.367,14.605
  rectangle net NetUR1_2: 19.304,0.508 21.336,14.605
  rectangle net NetC7_1: 26.162,6.985 27.432,11.938
  rectangle net NetD1_2: 34.925,13.97 39.497,14.859
  rectangle net B-: 37.592,2.921 38.1,3.683
  rectangle net B-: 37.846,2.159 38.735,3.556
  rectangle net B-: 32.639,1.778 33.528,2.667
  rectangle net B-: 35.306,0.127 36.449,1.905
  rectangle net B-: 38.227,4.826 39.497,6.731
  rectangle net NetC6_2: 31.115,5.08 32.258,6.096
  rectangle net NetC7_1: 24.257,9.017 26.416,10.668
  rectangle net NetC6_2: 31.623,3.429 33.401,4.572
  rectangle net NetC6_2: 31.623,3.429 32.639,5.207
  pour cut-out: -1.03,6.32 -3.429,6.32 -3.429,11.811 -1.03,11.811
Bottom Layer:
  rectangle net NetFUSE1_1: -3.048,8.636 -1.143,10.414
  rectangle net B-: -4.318,4.445 -1.143,6.223
  rectangle net GND: 45.72,0.127 47.879,5.842
  rectangle net GND: 45.72,0.127 51.308,2.159
  rectangle net GND: 44.069,3.937 45.72,6.858
  rectangle net GND: 40.259,6.223 46.101,7.874
  rectangle net GND: 45.72,10.795 47.879,12.7
  rectangle net GND: 45.72,3.937 49.276,11.049
  rectangle net GND: 40.259,6.223 41.021,7.874
  rectangle net NetFUSE1_2: 3.048,7.493 4.826,13.335
  rectangle net NetFUSE1_2: 0.127,12.065 4.826,13.716
  rectangle net B-: 1.778,4.064 23.495,6.731
  rectangle net B-: 8.763,3.048 30.607,4.699
  rectangle net B-: 28.321,1.778 33.02,4.699
  rectangle net GND: 50.165,0.381 51.308,2.159
  rectangle net GND: 40.386,6.223 42.672,6.731
  rectangle net B+: 50.8,3.81 52.451,14.605
  rectangle net B+: 31.496,10.414 33.401,14.732
  rectangle net B+: 32.004,13.335 52.578,14.732
  rectangle net B-: 38.481,5.842 39.497,6.731
  rectangle net B-: 38.735,5.588 39.497,6.731
  rectangle net B-: 39.497,5.207 43.18,5.969
  rectangle net B-: 37.592,2.667 38.1,3.683
  rectangle net B-: 35.306,0.127 36.449,1.397
  rectangle net B-: 37.846,3.429 38.354,3.81
  rectangle net B-: 37.846,2.921 38.735,3.429
  rectangle net B-: 37.846,0.889 38.862,3.175
  rectangle net B-: 35.814,0.889 38.608,1.905
  rectangle net VCHG: 42.672,0.254 45.212,1.27
  rectangle net VCHG: 44.069,0.254 45.212,2.159
  rectangle net B-: 28.067,8.763 29.337,10.287
  rectangle net B+: 33.147,0.381 35.052,1.616
  rectangle net NetC6_2: 24.257,5.08 32.258,6.096
  pour cut-out: -1.03,2.921 -3.556,2.921 -3.556,7.62 -1.03,7.62

## Silkscreen, mask and mechanical layers (free items; w line width, h text height)
Top Overlay:
  circle w0.5: c-9.017,7.5 r1.25
  circle w0.254: c64.643,7.5 r2.75
  circle w0.1: c64.658,7.5 r2.5
  circle w0.1: c-9,7.486 r2.5
  lines w0.1: -16,0.486 -16,7.5 ; -2.007,14.486 -9,14.486 ccw(c-9,7.486) -9,0.486 -2,0.486 ; -2,-0.014 -2,4.32 -1.736,4.32 -1.03,4.32 -1.03,6.32 -1.736,6.32 -1.968,6.32 ; -2,6.32 -2,8.511 -1.736,8.511 -1.03,8.511 -1.03,10.511 -1.736,10.511 -1.968,10.511 ; -2,10.511 -2,14.986 -2,14 ; -1.986,0 0,0 ; 0,5.334 1.778,5.334 ; 0,9.525 1.778,9.525 ; 0,14.986 0,0 ; 0.014,15 2.5,15 2.5,0 0,0 ; 1.651,5.334 2.54,5.334 ; 1.778,0.151 1.778,9.525 ; 1.778,15 1.778,9.525 ; 2.5,9.525 1.778,9.525 ; 51.435,4.604 55.118,4.604 ; 51.435,6.604 55.118,6.604 ; 51.435,8.604 55.118,8.604 ; 52.5,0 52.5,15 ; 71.658,0 71.658,7.493 ; 0,0 57.658,0 57.658,0.5 ; 57.658,0.5 64.658,0.5 ccw(c64.658,7.5) 64.658,14.5 57.658,14.5 57.658,8.604 56.658,8.604 56.658,4.604 57.658,4.604 57.658,0.5
Top Solder:
  rectangle: -3.175,8.509 -1.016,10.541
  rectangle: -3.175,4.318 -1.016,6.35
  rectangle: 56.642,4.572 58.42,8.636
  lines w2: -4.757,11.743 ccw(c-9,7.5) -4.404,3.643
  lines w2.6: -12,7.5 cw(c-9,7.5) -9,10.5 cw(c-9,7.5) -6,7.5 cw(c-9,7.5) -9,4.5 cw(c-9,7.5) -12,7.5
Bottom Solder:
  circle w2: c64.643,7.5 r4
  rectangle: 56.658,4.604 58.42,8.636
  rectangle: -3.175,8.509 -1.016,10.541
  rectangle: -3.175,4.318 -1.016,6.35
  lines w2.6: -12,7.5 ccw(c-9,7.5) -9,4.5 ccw(c-9,7.5) -6,7.5 ccw(c-9,7.5) -9,10.5 ccw(c-9,7.5) -12,7.5
Mechanical 1:
  lines w0.1: -7.253,14.486 -2.014,14.486 -2.014,11.924 ; -7.245,14.486 -9,14.486 ccw(c-9,7.486) -9,0.486 -7.226,0.486 ; -7.24,14.482 cw(c-9,7.5) -3.32,11.924 -2.014,11.924 ; -7.239,0.486 -2,0.486 -2,3.048 ; -7.226,0.491 ccw(c-8.986,7.472) -3.306,3.048 -2,3.048 ; -2.014,10.557 -2.014,11.924 ; -1.968,10.511 -1.736,10.511 -1.03,10.511 -0.03,10.511 ; -0.002,4.32 -1.03,4.32 -1.736,4.32 -2,4.32 -2,3.048 ; 0,4.32 0,2.54 0,1.016 0,0 55,0 55,1.016 57.658,1.016 57.658,0.5 64.658,0.5 ccw(c64.658,7.5) 64.658,14.5 57.658,14.5 57.658,13.97 55,13.97 55,15 0,15 0,13.335 0,12.446 0,10.541 ; -2,6.48 -0.03,6.48 -0.03,8.4 -2,8.4 -2,6.48 ; 55,1.905 55,12.7 57.658,12.7 57.658,8.604 56.658,8.604 56.658,4.604 57.658,4.604 57.658,1.905 55,1.905

## Dimensions
57.658,0 to 55,15 on Mechanical 1
-16.002,0.381 to 71.658,0 on Mechanical 1
0,0 to 55,0 on Mechanical 1

## Text inside footprints (layer, text, board x,y; h text height)
USB1: Top Overlay "USB" at 52.239,5.722 h1.27 r90